# Altium PCB Copy of 智能插座2019_1_7.PcbDoc
Units mil, origin at the board's own origin, x right, y up, seen from the top; angles counter-clockwise.
Board outline 3149.61 x 3089.41 mil, 2 copper layers (Top Layer, Bottom Layer); 88 components, 65 nets, 285 pads, 56 vias.
Unrouted connection lines stored in the file: 45.
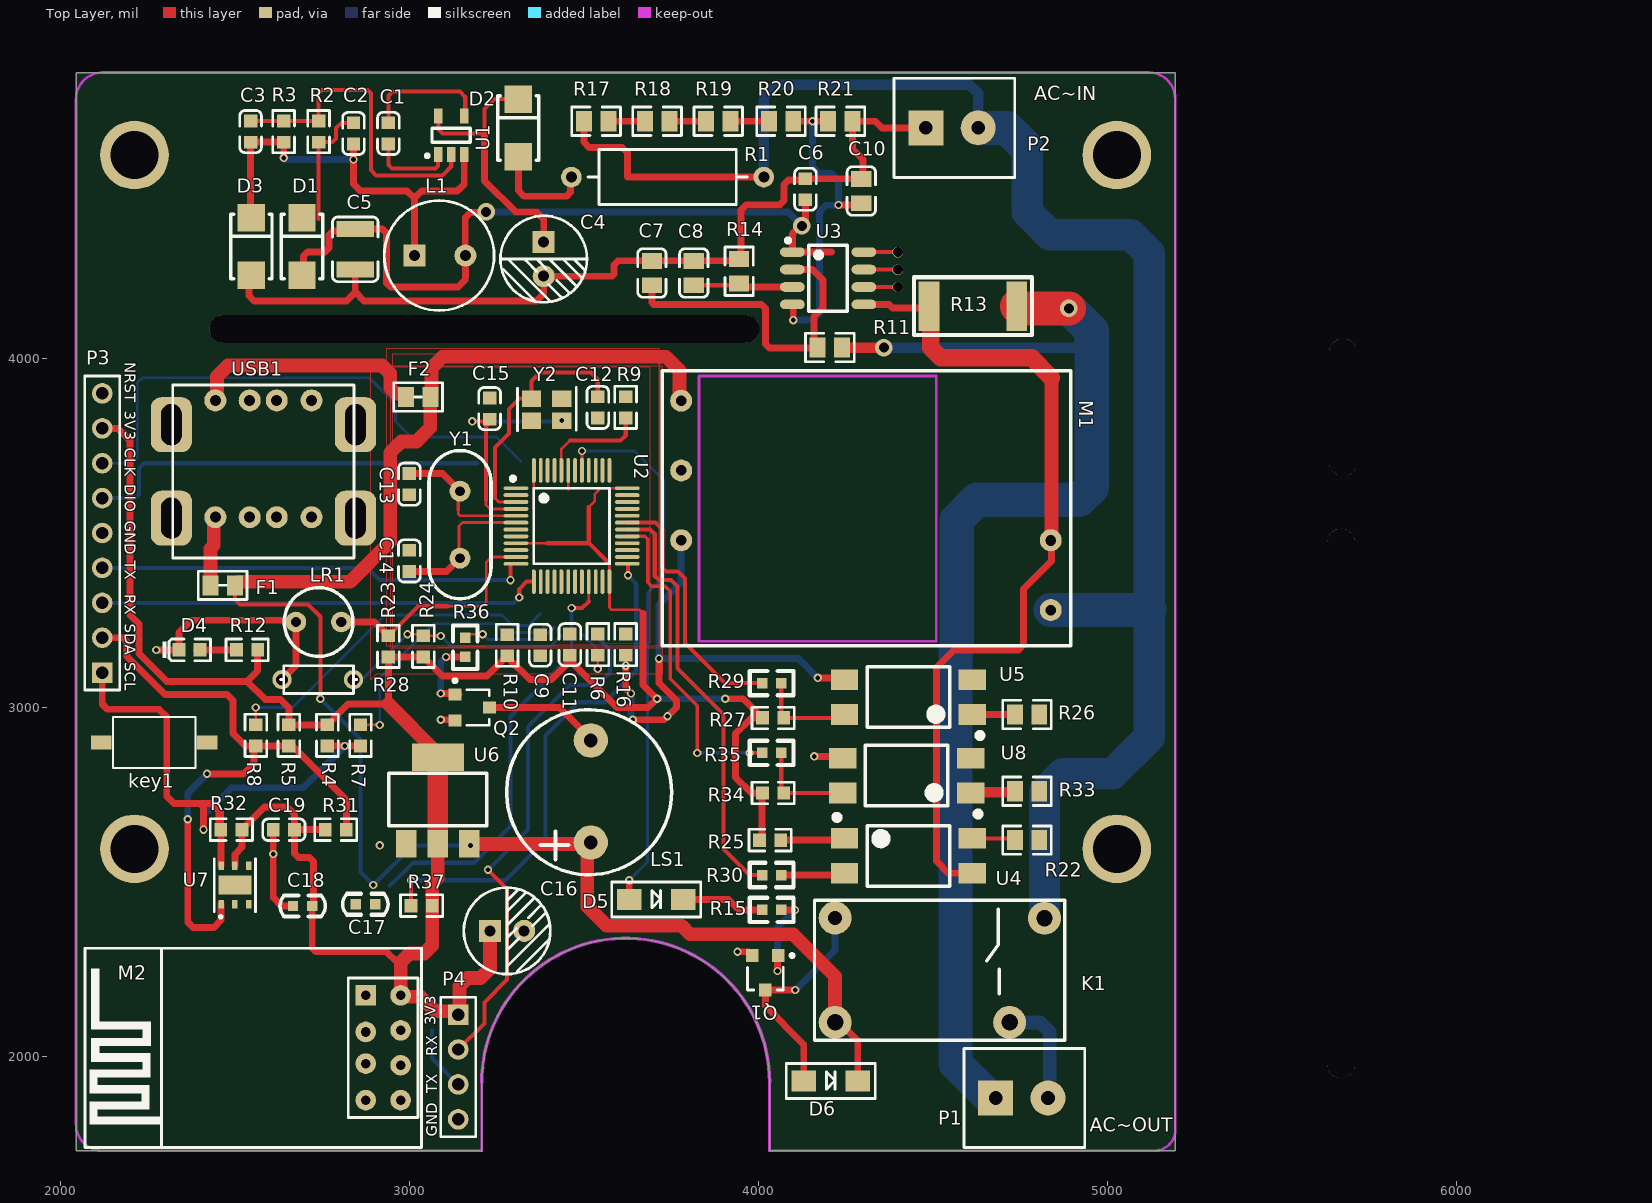
[diagram p0: Top Layer view]
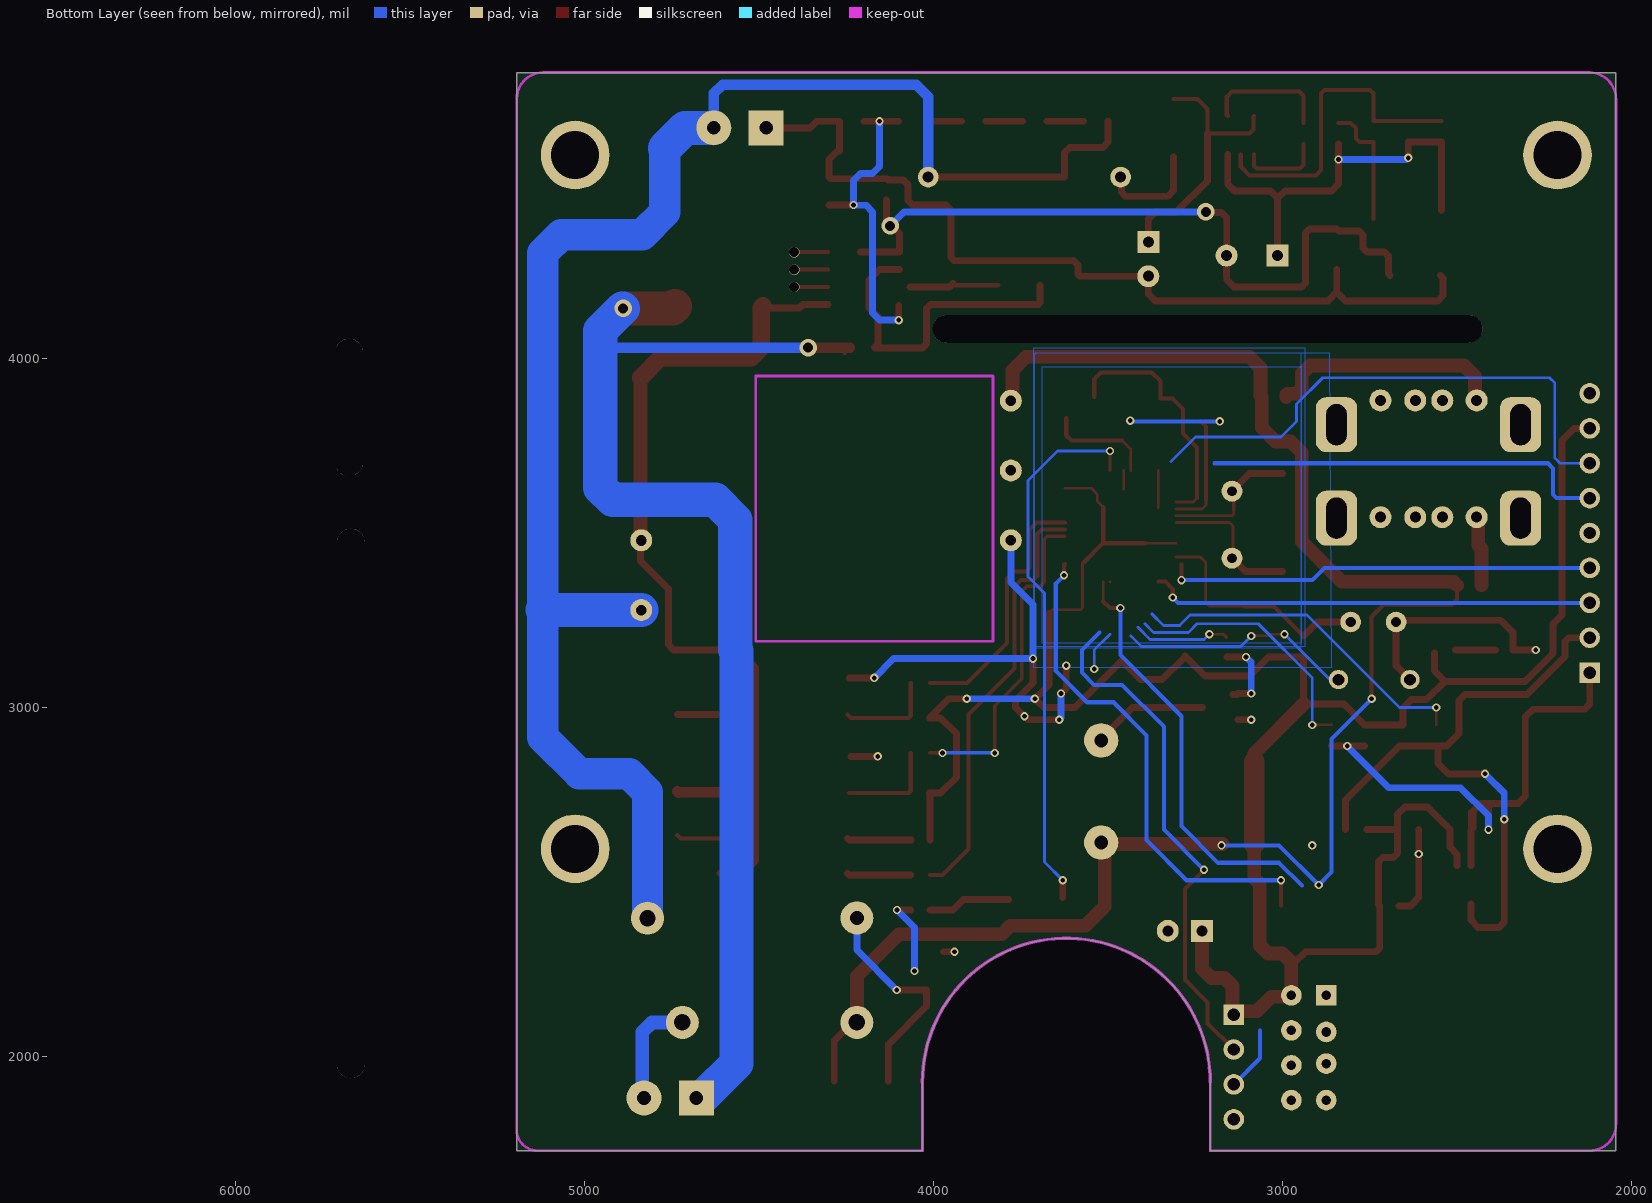
[diagram p1: Bottom Layer view, seen from below]

## Layer stack, top to bottom
Top Solder: solder mask 0.4, Solder Resist, Dk 3.5
Top Layer: signal copper 1.4
Dielectric1: dielectric 12.6, FR-4, Dk 4.8
Bottom Layer: signal copper 1.4
Bottom Solder: solder mask 0.4, Solder Resist, Dk 3.5

## Board outline
2045,1730 2045,4819.41 5194.61,4819.41 5194.61,1730 4032.32,1730 4032.32,1925.71 ccw(c3619.84,1926.42) 3207.36,1925.71 3207.36,1730.04 3207.32,1730

## Design rules (kind name [scope] priority, off if disabled: settings)
Clearance [All] p1: gap=5 ignorepadtopadclearanceinfootprint=FALSE
ComponentClearance [All] p1 off: gap=10 collisioncheckmode=3 verticalgap=10 showdistances=FALSE
FabricationTestPointUsage TestPointUsage [All] p1: valid=0 allowmultiple=FALSE
FabricationTestpoint Testpoint [All] p1: side=3 testpointundercomponent=TRUE minsize=40 maxsize=100 preferedsize=60 minholesize=0 maxholesize=40 preferedholesize=32 testpointgrid=1 allowsidetop=TRUE allowsidebottom=TRUE usegrid=TRUE gridtolerance=0.01
PolygonConnect [All] p1: connectstyle=Relief reliefconductorwidth=10 reliefentries=4 polygonreliefangle="90 Angle" airgapwidth=10
RoutingVias [All] p1 off: holewidth=28 width=50 viastyle="Through Hole" minholewidth=28 minwidth=50 maxholewidth=28 maxwidth=50
SolderMaskExpansion [All] p1: expansion=4
Width [All] p1: maxlimit=308.11 minlimit=7.87 preferedwidth=19.68
27 further rules are at their usual default settings.

## Components (designator, comment, footprint, x,y, rotation, side; value= is the part's Value field where it differs from the comment)
C1 "2.2μF/10V" LC-0603_C 2940,4645 r270 top value="100nF (104) ±10% 50V"
C2 "220nF" LC-0603_C 2840,4645 r90 top value="100nF (104) ±10% 50V"
C3 "470pF" LC-0603_C 2545,4650.32 r90 top value="100nF (104) ±10% 50V"
C4 "3.3μF/400V" CAP-ELECT-TH-6.3X7 3385,4285 r270 top value=2.2μF/400V
C5 "100μF" LC-1210_C 2845,4313.07 r90 top value="100nF (104) ±10% 50V"
C6 "0.1μF" LC-0603_C 4135,4485 r90 top value="100nF (104) ±10% 50V"
C7 "33nF" LC-0805_C 3695,4245 r90 top value="100nF (104) ±10% 50V"
C8 "33nF" LC-0805_C 3815,4245 r270 top value="100nF (104) ±10% 50V"
C9 "0.1μF" LC-0603_C 3375,3178.37 r90 top
C10 "33nF" LC-0805_C 4295,4480 r90 top value="100nF (104) ±10% 50V"
C11 "0.1μF" LC-0603_C 3460,3180 r270 top
C12 "6pF" LC-0603_C 3540,3860 r270 top
C13 "20pF" LC-0603_C 3000,3640 r270 top
C14 "20pF" LC-0603_C 3000,3420 r90 top
C15 "6pF" LC-0603_C 3230,3856.61 r90 top
C16 "1000μF/400V" CAP-ELECT-TH-6.3X7 3280,2360 r0 top value=2.2μF/400V
C17 "104" 0603C 2880,2435 r0 top
C18 "104" 0603C 2700,2430 r0 top
C19 "0.1μF" LC-0603_C 2640.43,2649.96 r0 top
D1 "1N4007" LC-SMA(DO-214AC)_S1 2700,4320 r270 top
D2 "1N4007" LC-SMA(DO-214AC)_S1 3320,4660 r270 top
D3 "US1J(600V 1A)" LC-SMA(DO-214AC)_S1 2555,4320 r270 top
D4 "POWER" LC-0603_LED_S1 2370,3165 r0 top value=红?
D5 "IN4148" 1206D 3580,2420 r90 top
D6 "" 1206D 4080,1900 r90 top
F1 "1.1A  自恢复保险丝" AFUSE 2460,3360 r180 top
F2 "1.1A  自恢复保险丝" AFUSE 3020,3900 r180 top
K1 "Relay-5V" SJ-S-105LMH 4220,2200 r0 top
key1 "SW" KEY-2 2420,2900 r180 top
L1 "1mH" L-10X14 3085.32,4295 r0 top
LR1 "光敏电阻" GUANGMIN 2740,3245 r180 top
LS1 "BUZZER 5V" BUZZER 3520,2760 r270 top
M1 "ACDC_THX208based" ACDC_THX208 4895,3180 r180 top
M2 "ESP-01&01S Module" "ESP-01&01S Module" 2925,2025 r90 top
P1 "Header" 3.81-2P 4680,1880 r0 top
P2 "Header" 3.81-2P 4480,4660 r0 top
P3 "Header 9" HDR1X9 2120,3100 r90 top
P4 "Header 4" HDR1X4 3140,2120 r270 top
Q1 "S8050" SOT-23 4020,2240 r180 top
Q2 "S8050" SOT-23 3180,3000 r270 top
R1 "39Ω/1W" R-1W-THT 3740,4520 r180 top
R2 "5.49KΩ" LC-0603_R 2740,4650.32 r270 top
R3 "4.99KΩ" LC-0603_R 2640,4650.31 r90 top
R4 "4.7KΩ" LC-0603_R 2765,2920 r270 top
R5 "4.7KΩ" LC-0603_R 2655,2920 r270 top
R6 "10KΩ" LC-0603_R 3540,3180 r270 top
R7 "100" LC-0603_R 2860,2920 r90 top
R8 "100" LC-0603_R 2560,2920 r90 top
R9 "10KΩ" LC-0603_R 3620,3860 r90 top
R10 "10KΩ" LC-0603_R 3280,3178.37 r270 top
R11 "1KΩ,1%" LC-0805_R 4205,4031.46 r0 top
R12 "1.5KΩ" LC-0603_R 2535,3165 r0 top
R13 "2mΩ/25A" R2512 4615,4150 r180 top
R14 "1KΩ,1%" LC-0805_R 3945,4250 r90 top
R15 "Res2" 0603 4065.61,2420 r180 top value=4.7K
R16 "0Ω" LC-0603_R 3620,3180 r90 top
R17 "470KΩ,1%" LC-0805_R 3535,4680 r180 top
R18 "470KΩ,1%" LC-0805_R 3710,4680 r180 top
R19 "470KΩ,1%" LC-0805_R 3885,4680 r180 top
R20 "470KΩ,1%" LC-0805_R 4065,4680 r180 top
R21 "1KΩ,1%" LC-0805_R 4235,4680 r0 top
R22 "1KΩ,1%" LC-0805_R 4770,2620 r0 top
R23 "10KΩ 1%" LC-0603_R 2940,3175 r270 top
R24 "10KΩ 1%" LC-0603_R 3040,3175 r270 top
R25 "2.2KΩ" LC-0603_R 4033.99,2620 r180 top
R26 "1KΩ,1%" LC-0805_R 4769.96,2980 r0 top
R27 "2.2KΩ" LC-0603_R 4042.25,2970 r180 top
R28 "MF52-10K   3950 1％" AXIAL-0.3 2740,3080 r180 top value=MF52-10K
R29 "0Ω/1W" 0603 4065.61,3070 r180 top
R30 "0Ω/1W" 0603 4010.61,2520 r0 top
R31 "10KΩ" LC-0603_R 2789.17,2649.96 r0 top
R32 "10KΩ" LC-0603_R 2490,2650 r180 top
R33 "1KΩ,1%" LC-0805_R 4769.96,2760 r0 top
R34 "2.2KΩ" LC-0603_R 4042.25,2755 r180 top
R35 "0Ω/1W" 0603 4065.61,2870 r180 top
R36 "4.7K" 0603 3160,3200 r270 top
R37 "4.7KΩ" LC-0603_R 3035,2432.22 r0 top
U1 "MP150" LC-SOT-23-5 3120,4640 r270 top
U2 "STM32F103C8T6" LC-LQFP-48_7x7x05P 3465,3520 r270 top
U3 "HLW8032" LC-SOP-8_150mil 4200,4230 r270 top
U4 "PC817" LC-SMD-4 4430,2575 r0 top
U5 "PC817" LC-SMD-4 4430,3030 r180 top
U6 "LM1117-3.3V" SOT-223/P2.3 3080,2720 r90 top
U7 "SHT1" SHT2X 2500.04,2436.5 r0 top
U8 "PC817" LC-SMD-4 4425,2805 r180 top
USB1 "2_USB" 2_USB 2600,3880 r180 top
Y1 "8M" 49/U_N 3145,3620 r270 top value="25MHz ±20ppm 20pF"
Y2 "32.768K" 0SC_3225 3390,3860 r180 top

## Footprints (in the part's own frame and the unit in brackets; to place one, negate y for a bottom-side part, rotate by r counter-clockwise, add the part's x,y. Pads: shape width x height; smd on the part's side, far side on the other; paste and mask are expansions set on the pad)
0SC_3225 [mm]
  rect 1.4x1.2 smd: 1(-1.184,0.965) 2(1.016,-0.635) GND(-1.184,-0.635) GND(1.016,0.965)
  silkscreen extent -2.24,-1.45 2.03,1.7
2_USB [mm]
  rrect50% 3x4 hole 1.5 slot 3 at 90 deg: 0(-6.24,8.57) 0(-6.24,1.77) 0(7.16,8.57) 0(7.16,1.77)
  round 1.6 hole 0.8: 1(3.96,8.5) 2(-0.508,8.5) 3(1.46,8.5) 4(-3.04,8.5) 5(3.96,0) 6(-0.508,0) 7(1.46,0) 8(-3.04,0)
  silkscreen extent -6.14,-1.13 7.06,11.47
3.81-2P [mil]
  rect 100x100 hole 39.37: 1(0,0.99)
  round 100 hole 39.37: 2(150,1)
  silkscreen extent -91,-141 255,143
49/U_N [mil]
  round 60 hole 28: 1(0,0) 2(192,0)
  silkscreen extent -116,-88 308,89, body extent -117,-88 309,89, height 512
0603 [mil]
  rect 30x30 smd: 1(0,0) 2(55,0)
  silkscreen extent -35,-35 90,35
0603C [mil]
  rect 30x30 smd: 1(21.61,1.26) 2(-33.39,1.26)
  silkscreen extent -71,-29 59,31
1206D [mil]
  rect 60x70 smd: 1(30,-50) 2(30,-205)
  silkscreen extent -20,-255 80,0
ACDC_THX208 [mm]
  round 1.6 hole 0.762: 1(1.45,-2.52) 3(28.35,-7.6) 4(28.35,-12.68) 5(28.35,-17.76)
  round 1.6 hole 0.8: 2(1.45,-7.6)
  silkscreen extent 0,-19.94 29.72,0.06
AFUSE [mm]
  rect 1.16x1.47 smd: 1(-1.017,0.254) 2(0.763,0.254)
  silkscreen extent -1.9,-0.78 1.64,1.29, body extent -1.12,-0.37 0.88,0.88, height 0.49
AXIAL-0.3 [mm] "Resistor; 2 Leads"
  round 1.4 hole 0.85: 1(-2.54,0) 2(2.667,0)
  silkscreen extent -2.77,-1.02 2.77,1.02
BUZZER [mm]
  round 2.5 hole 1: 1(3.728,0) 2(-3.703,0)
  silkscreen extent -5.93,-6.12 6.07,5.87
CAP-ELECT-TH-6.3X7 [mm]
  rect 1.6x1.6 hole 0.8: 1(-1.25,0)
  round 1.6 hole 0.8: 2(1.25,0)
  silkscreen extent -3.15,-3.15 3.15,3.15
"ESP-01&01S Module" [mm]
  rect 1.5x1.5 hole 0.7: 1(3.81,1.27)
  round 1.5 hole 0.7: 2(1.15,1.27) 3(-1.15,1.27) 4(-3.81,1.27) 5(3.81,-1.27) 6(1.27,-1.27) 7(-1.27,-1.27) 8(-3.81,-1.27)
  silkscreen extent -7.25,-2.79 7.25,21.71
GUANGMIN [mm]
  round 1.5 hole 0.75: 1(-1.651,0) 2(1.651,0)
  silkscreen extent -2.5,-2.5 2.5,2.5
HDR1X4 [mm] "Connector; Header; 4 Position"
  rect 1.5x1.5 hole 0.9: 1(0,0)
  round 1.5 hole 0.9: 2(2.54,0) 3(5.08,0) 4(7.62,0)
  silkscreen extent -1.27,-1.27 8.89,1.27
HDR1X9 [mm] "Connector; Header; 9 Position"
  rect 1.5x1.5 hole 0.9: 1(0,0)
  round 1.5 hole 0.9: 2(2.54,0) 3(5.08,0) 4(7.62,0) 5(10.16,0) 6(12.7,0) 7(15.24,0) 8(17.78,0) 9(20.32,0)
  silkscreen extent -1.27,-1.27 21.59,1.27
KEY-2 [mm]
  rect 1.5x1 smd: 1(-0.005,-0.001) 2(7.685,-0.001)
  silkscreen extent 0.85,-1.85 6.85,1.86
L-10X14 [mm]
  rect 1.6x1.6 hole 0.8: 1(-1.786,0)
  round 1.6 hole 0.8: 2(1.913,0)
  silkscreen extent -4,-4 4,4
LC-0603_C [mm]
  rect 0.93x0.98 smd: 1(-0.77,0) 2(0.77,0)
  silkscreen extent -1.54,-0.79 1.54,0.79, body extent -0.8,-0.4 0.8,0.4, height 0.3
LC-0603_LED_S1 [mm]
  rect 0.93x0.98 smd: A(0.77,0) K(-0.77,0)
  silkscreen extent -1.97,-0.79 1.53,0.79, body extent -0.8,-0.4 0.8,0.4, height 0.6
LC-0603_R [mm]
  rect 0.93x0.98 smd: 1(-0.77,0) 2(0.77,0)
  silkscreen extent -1.53,-0.79 1.54,0.79, body extent -0.85,-0.4 0.85,0.4, height 0.56
LC-0805_C [mm]
  rect 1.16x1.47 smd: 1(-0.89,0) 2(0.89,0)
  silkscreen extent -1.77,-1.04 1.77,1.04, body extent -1,-0.62 1,0.63, height 0.77
LC-0805_R [mm]
  rect 1.16x1.47 smd: 1(-0.89,0) 2(0.89,0)
  silkscreen extent -1.77,-1.03 1.77,1.04, body extent -1,-0.62 1,0.63, height 0.49
LC-1210_C [mm]
  rect 1.16x2.72 smd: 1(-1.475,0) 2(1.475,0)
  silkscreen extent -2.36,-1.66 2.35,1.66, body extent -1.6,-1.25 1.6,1.25, height 1.3
LC-LQFP-48_7x7x05P [mm]
  oval 0.28x1.8 smd: 1(-2.75,-4.05) 2(-2.25,-4.05) 3(-1.75,-4.05) 4(-1.25,-4.05) 5(-0.75,-4.05) 6(-0.25,-4.05) 7(0.25,-4.05) 8(0.75,-4.05) 9(1.25,-4.05) 10(1.75,-4.05) 11(2.25,-4.05) 12(2.75,-4.05) 25(2.75,4.05) 26(2.25,4.05) 27(1.75,4.05) 28(1.25,4.05) 29(0.75,4.05) 30(0.25,4.05) 31(-0.25,4.05) 32(-0.75,4.05) 33(-1.25,4.05) 34(-1.75,4.05) 35(-2.25,4.05) 36(-2.75,4.05)
  oval 1.8x0.28 smd: 13(4.05,-2.75) 14(4.05,-2.25) 15(4.05,-1.75) 16(4.05,-1.25) 17(4.05,-0.75) 18(4.05,-0.25) 19(4.05,0.25) 20(4.05,0.75) 21(4.05,1.25) 22(4.05,1.75) 23(4.05,2.25) 24(4.05,2.75) 37(-4.05,2.75) 38(-4.05,2.25) 39(-4.05,1.75) 40(-4.05,1.25) 41(-4.05,0.75) 42(-4.05,0.25) 43(-4.05,-0.25) 44(-4.05,-0.75) 45(-4.05,-1.25) 46(-4.05,-1.75) 47(-4.05,-2.25) 48(-4.05,-2.75)
  silkscreen extent -3.6,-4.42 2.75,2.75
LC-SMA(DO-214AC)_S1 [mm]
  rect 2x2 smd: 1(2.076,-0.194) 2(-2.124,-0.194)
  silkscreen extent -2.37,-1.69 2.33,1.31
LC-SMD-4 [mm]
  rect 2x1.5 smd: 1(-4.65,1.27) 2(-4.65,-1.27) 3(4.65,-1.27) 4(4.65,1.27)
  silkscreen extent -5.4,-2.2 3,3, body extent -5.02,-2.42 5.01,2.42, height 3.9
LC-SOP-8_150mil [mm]
  oval 0.7x1.8 smd: 1(-1.905,-2.6) 2(-0.635,-2.6) 3(0.635,-2.6) 4(1.905,-2.6) 5(1.905,2.6) 6(0.635,2.6) 7(-0.635,2.6) 8(-1.905,2.6)
  silkscreen extent -2.9,-3.07 2.4,1.4, body extent -2.5,-3.1 2.5,3.1, height 1.75
LC-SOT-23-5 [mm]
  rect 1.1x0.6 smd: 1(1.4,-0.95) 2(1.4,0) 3(1.4,0.95) 4(-1.4,0.95) 5(-1.4,-0.95)
  silkscreen extent -0.5,-1.87 1.62,1.4
R2512 [mm]
  rect 1.5x3.6 smd: 1(-3.2,0) 2(3.2,0)
  silkscreen extent -4.3,-2.1 4.3,2.1
R-1W-THT [mm]
  round 1.5 / inner oval 1.5x2 / far side round 1.5 hole 0.8: 1(-7,0)
  round 1.5 hole 0.8: 2(7,0)
  silkscreen extent -5.8,-2 5.8,2
SHT2X [mm]
  rect 2.4x1.4 smd: 0(0,1.4)
  rect 0.4x0.6 smd: 1(-1,0) 2(0,0) 3(1,0) 4(1,2.8) 5(0,2.8) 6(-1,2.8)
  silkscreen extent -1.5,-0.95 1.5,3.3
SJ-S-105LMH [mm]
  round 2.4 hole 1: 1(0,5)
  round 2.4 hole 1.2: 2(0,-2.6) 3(15.24,4.984) 4(12.7,-2.6)
  silkscreen extent -1.5,-3.9 16.7,6.3
SOT-23 [mm] "SOT-23; 3 Leads; Body 3.0 x 2.6 mm, inc. leads (LxW max)"
  rect 0.9x0.95 smd: 1(-0.95,-1.25) 2(0.95,-1.25) 3(0,1.25)
  silkscreen extent -2.08,-1.37 1.3,1.25
SOT-223/P2.3 [mil]
  rect 79x59 smd: 1(-111,89.1) 2(-111,-1.45) 3(-111,-92)
  rect 79x150 smd: 2(137,-1.9)
  silkscreen extent -59,-141 91,139

## Part data
C1 C2 C3 C5 C6 C7 C8 C10: library part CAP, "贴片电容"
C4 C16: library part "Cap Pol1", "直插电解电容", LatestRevisionDate=17-Jul-2002, LatestRevisionNote="Re-released for DXP Platform.", PackageReference=RB7.6-15, Published=8-Jun-2000, Publisher="Altium Limited"
C9 C11 C12 C13 C14 C15 C19: library part Cap, "贴片电容", 封装=0
C17 C18: library part CAP, "Capacitor"
D1 D2 D3: library part "Diode 1N5408", "贴片二极管", ComponentLink1Description="Manufacturer Link", ComponentLink1URL=http://www.irf.com/, DatasheetDocument=Aug-1984, LatestRevisionDate=17-Jul-2002, LatestRevisionNote="Re-released for DXP Platform.", PackageReference=DO-201AD, Published=8-Jun-2000, Publisher="Altium Limited"
D4: library part LED1, "发光二极管"
D5 D6: library part Diode, "Default Diode", PackageDocument=Sep-1996, Code_JEDEC=DO-214-AB, LatestRevisionDate=17-Jul-2002, LatestRevisionNote="Re-released for DXP Platform.", PackageReference=SMC, Published=8-Jun-2000, Publisher="Altium Limited"
F1 F2: library part "Fuse 2", "Fuse", LatestRevisionDate=17-Jul-2002, LatestRevisionNote="Re-released for DXP Platform.", PackageReference=PIN-W2/E2.8, Published=8-Jun-2000, Publisher="Altium Limited"
K1: library part SJ-S-105LMH, "Single-Pole Dual-Throw Relay", LatestRevisionDate=17-Jul-2002, LatestRevisionNote="Re-released for DXP Platform.", PackageReference=MODULE5B, Published=24-Mar-1999, Publisher="Altium Limited"
key1: "Switch", LatestRevisionDate=17-Jul-2002, LatestRevisionNote="Re-released for DXP Platform.", PackageReference=SPST-2, Published=24-Mar-1999, Publisher="Altium Limited"
L1: library part IND_8, "直插绕线电感", AtherosDescription="IND,SMT,SHIELDING CHOKE,10uH,7.3x7.3", ATHEROS KEY=078-100LM-000, CISPartType=Inductor\Ferrite, OriginalSymbolOrigin=(0,0)
LS1: library part Bell, "Electrical Bell", LatestRevisionDate=17-Jul-2002, LatestRevisionNote="Re-released for DXP Platform.", PackageReference=PIN2, Published=24-Mar-1999, Publisher="Altium Limited"
M1: library part ACDC, "THX208Based"
P1 P2: library part "Header 2", "Header, 2-Pin", LatestRevisionDate=17-Jul-2002, LatestRevisionNote="Re-released for DXP Platform.", Publisher="Altium Limited"
P3: "Header, 9-Pin", LatestRevisionDate=17-Jul-2002, LatestRevisionNote="Re-released for DXP Platform.", Publisher="Altium Limited"
P4: "Header, 4-Pin", LatestRevisionDate=17-Jul-2002, LatestRevisionNote="Re-released for DXP Platform.", Publisher="Altium Limited"
Q1 Q2: library part NPN, "NPN Bipolar Transistor", Code_JEDEC=TO-226-AA, LatestRevisionDate=17-Jul-2002, LatestRevisionNote="Re-released for DXP Platform.", PackageReference=TO-226, Published=8-Jun-2000, Publisher="Altium Limited"
R1 R2 R3 R4 R5 R6 R7 R8 R9 R10 R11 R12 R13 R14 R16 R17 R18 R19 R20 R21 R22 R23 R24 R25 R26 R27 R29 R30 R31 R32 R33 R34 R35: library part 电阻, "贴片电阻"
R15: "Resistor", LatestRevisionDate=17-Jul-2002, LatestRevisionNote="Re-released for DXP Platform.", PackageReference=AXIAL-0.4, Published=8-Jun-2000, Publisher="Altium Limited"
R28: library part "Res Adj2", "Variable Resistor", LatestRevisionDate=17-Jul-2002, LatestRevisionNote="Re-released for DXP Platform.", PackageReference=AXIAL-0.6, Published=8-Jun-2000, Publisher="Altium Limited", Set Position=0.5
R36: library part Res2, "Resistor", LatestRevisionDate=17-Jul-2002, LatestRevisionNote="Re-released for DXP Platform.", PackageReference=0805, Published=8-Jun-2000, Publisher="Altium Limited"
R37: library part "0805 62KΩ (6202) 1%", "贴片电阻", Package=0402, SuppliersPartNumber=C17783, ComponentLink1Description=¹©Ó, ComponentLink1URL=http://www.szlcsc.com/product/details_18471.html, Supplier=LC
U1 U3: "IC"
U2: library part STM32F103CBT6, "IC", ComponentLink1Description="Manufacturer Link", ComponentLink1URL=www.st.com/stm32, ComponentLink2Description=Datasheet, ComponentLink2URL=http://www.st.com/stonline/products/literature/ds/13587.pdf, DatasheetVersion="rev6, Mar-2008", PackageDescription="48-Pin Low-Profile Quad Flat Pack, 7 x 7 mm Body, 0.5 mm Pitch (LQFP48)", PackageReference=LQFP48, PackageVersion=Mar-2008, Published=30-May-2008, Publisher="Altium Limited", 型号=STM32F103C, 封装=LQF
U4 U5 U8: library part PS2501L-1-F3-A, "IC"
U6: library part 1117
U7: library part SHT21
Y1: library part XTAL_1, "晶振（直插）", LatestRevisionDate=17-Jul-2002, LatestRevisionNote="Re-released for DXP Platform.", PackageReference=R38, Published=8-Jun-2000, Publisher="Altium Limited"
Y2: library part XTAL, "Crystal Oscillator", LatestRevisionDate=17-Jul-2002, LatestRevisionNote="Re-released for DXP Platform.", PackageReference=R38, Published=8-Jun-2000, Publisher="Altium Limited"

## Free pads (board coordinates)
  round 196.85 hole 137.8: 0(2212.32,2595) 0(2212.32,4583.19) 0(5027.28,2595) 0(5027.28,4583.19)
  oval 1574.8x78.74 hole 78.74 slot 1574.8 at 0 deg unplated paste+0: 0(3215,4085)
  oval 78.74x1574.8 hole 78.74 slot 1574.8 at 90 deg unplated paste+0: 0(5670,2725)
  oval 78.74x393.7 hole 78.74 slot 393.7 at 90 deg unplated paste+0: 0(5675,3860)

## Via types
v1: diameter 23.62, hole 13.78, Top Layer to Bottom Layer, 49 vias
v2: diameter 50, hole 28, Top Layer to Bottom Layer, 4 vias
v3: diameter 30, hole 28, Top Layer to Bottom Layer, 3 vias

## Nets (pads, with @x,y where several pads share a name; then routed paths per layer and width w, separated by ;. In a path a pad name is that pad's centre, name@x,y a point inside that pad or via, vN(x,y) a via of type N, cw(c..) or ccw(c..) an arc to the next point about the centre after c; other vN are vias at no path point)
+3.3V: C11.2 C16.1 C18.1 C19.2 M2.5 P3.8 P4.1 R4.1 R5.1 R10.2 R12.2 R23.2 R24.2 R25.2 R27.2 R31.1 R32.1 R34.2 R37.2 U2.9 U2.24 U2.36 U2.48 U6.2 U7.5 | length 7173.5
  Top Layer w7.87: U2.9 3395,3470.79 ; 3356.73,3573.27 U2.48 ; 3514.21,3574.21 3530.89,3590.89 3530.89,3610.89 3548.27,3628.27 U2.36 ; 3570,3415 3573.27,3411.73 U2.24 3573.27,3286.73 3580,3280 3660,3280 3670,3270
  Top Layer w11.81: 3395,3470.79 3514.21,3470.79 ; 3514.21,3574.21 3514.21,3470.79 ; 3570,3415 3514.21,3470.79
  Top Layer w19.68: P3.8 2165,3800 2200,3765 2200,3265 2225,3240 2225,3155 2305,3075 2535,3075 ; U7.5 2500,2546.77 2500,2579.41 2520.31,2599.72 R32.1 2585.31,2715 2650,2715 2670.75,2694.25 C19.2 ; R12.2@2565.32,3156.18 2565.32,3105.32 2535,3075 ; R5.1 R5.1@2655,2955 ; R31.1 C19.2 ; R23.2 R24.2 3094.68,3090 3221.94,3090 R10.2 ; R23.2@2940,3145 2940,3010 2824.68,3010 R4.1 2659.68,2950.32 R5.1@2655,2955 ; 2975,2269.1 2965.9,2269.1 2935,2300 2733.15,2300 2721.61,2311.53 C18.1 2725,2434.65 2725,2558.47 2713.47,2570 2682.28,2570 2670.75,2581.53 C19.2 ; U6.2@3081.45,2845 3081.45,2856.55 U6.2@3081.45,2868.55 ; R10.2@3280,3145 3345,3080 3406.94,3080 C11.2@3460,3133.06 ; C11.2@3460,3135 3595,3000 3683.99,3000 v1@3708.99,3025 ; 3670,3270 3670,3065 v1(3710,3025) ; v1(3905,3025) 3956.93,3025 R27.2 3980,2970 3935,2925 3935,2800 3980,2755 R34.2 4010,2753.07 R25.2@4010,2620 ; 2535,3075 2587.5,3022.5 2630.65,3022.5 2655,2998.15 R5.1@2655,2955
  Top Layer w39.37: 2940,3010 U6.2@3081.45,2868.55 ; U6.2@3081.45,2609 3081.45,2510.45 3065.32,2494.31 R37.2 3065.32,2318.06 3042.25,2295 3000.9,2295 2975,2269.1 M2.5 2978.77,2171.23 3031.94,2171.23 3073.33,2129.84 3130.16,2129.84 P4.1 3143.58,2123.58 3143.58,2201.94 3166.65,2225 3204.21,2225 3230.79,2251.58 C16.1 ; U6.2@3081.45,2856.55 U6.2@3081.9,2857
  Top Layer w59.06: U6.2@3081.45,2609 U6.2@3081.45,2845
  Bottom Layer w19.68: v1(3710,3025) v1(3905,3025)
+5V: C17.1 D6.2 F1.1 F2.1 K1.2 LS1.1 M1.5 U6.3 | length 5023.2
  Top Layer w11.81: F1.1 2500.04,3310 2515.04,3295 2710,3295 2745,3260 v1(2745,3025) ; v1(2896.61,2491.61) v1@2900,2495
  Top Layer w19.68: K1.2 4232.36,2097.64 4285,2045 D6.2
  Top Layer w39.37: F1.1 2510.04,3360 2830,3360 2945,3475 2945,3730 2977.5,3762.5 3020.53,3762.5 3060.04,3802.01 F2.1 3063.19,3893.15 3063.19,3973.19 3095,4005 3735,4005 3774.34,3965.66 3774.34,3883.73 M1.5 ; U6.3 LS1.1@3515.78,2609 ; LS1.1 3510,2603.22 3510,2430 3565,2375 3780,2375 3805,2350 4100,2350 4220,2230 K1.2
  Bottom Layer w11.81: v1(2745,3025) 2860,2910 2860,2528.23 v1(2896.61,2491.61) 3010,2605 v1(3175,2605)
A+5V: C5.2 C6.1 D1.1 L1.2 R22.2 R26.2 R33.2 U3.1 | length 2151.4
  Top Layer w19.68: D1.1 2697.2,4243.11 2697.2,4293.47 2708.73,4305 2758.47,4305 2770,4316.53 2770,4353.47 2781.53,4365 2838.86,4365 C5.2 2923.47,4371.14 2935,4359.61 2935,4216.53 2946.53,4205 3140,4205 3160,4225 3160,4233.35 3160.63,4233.98 L1.2 ; L1.2@3160,4305 3160,4403 3175.55,4418.55 3218.55,4418.55 v2(3220,4420) ; v2@4122.5,4382.5 4097.64,4357.64 U3.1 4210,4305 ; v2@4135,4395 C6.1
  Bottom Layer w19.68: v2(3220,4420) 4085,4420 v2(4125,4380)
AC220V-L: K1.3 M1.1 P2.2 R1.1 R17.2 | length 4768.5
  Top Layer w19.68: R17.2 3499.96,4620.04 3515,4605 3610,4605 3625,4590 3625,4520 R1.1
  Bottom Layer w30: R1.1 4015.59,4750.59 4050,4785 4605,4785 4630,4760 P2.2
  Bottom Layer w90: 4770,4603.04 4770,4420 4835,4355 5067.28,4355 5120,4302.28 5120,3280 5120,2915 5015,2810 4872.72,2810 4820,2757.28 K1.3
  Bottom Layer w98.43: P2.2 4630.3,4660.7 4712.34,4660.7 4770,4603.04 ; M1.1 5119.21,3279.21 5120,3280
AC220V-N: C4.2 C5.1 C6.2 C7.2 C8.1 C10.2 D3.1 M1.2 P2.1 R13.2 R14.2 R21.2 U3.5 U4.3 | length 5050.9
  Top Layer w19.68: D3.1 2540,4230.91 2540,4180 2555,4165 2820,4165 2845,4190 ; C5.1 2845,4190 ; R21.2 4270,4595 4275,4595 4300,4570 4300,4520.04 C10.2 4294.73,4515.31 C6.2 4130.87,4511.18 4086.18,4511.18 4073.78,4498.78 4073.78,4453.46 4060.32,4440 3965,4440 3950,4425 3950,4290.04 3940,4280.04 C8.1 C7.2 3598.01,4280.04 3586.48,4268.51 3586.48,4241.48 3580.78,4235.78 C4.2 3385,4185 3365,4165 2870,4165 2845,4190 ; R21.2 4335,4680 4354.01,4660.99 P2.1 ; U3.5 4375,4155 4385,4145 4484.02,4145 R13.2 R13.2@4490,4150.98 ; U4.3 4545,2525 4510,2560 4510,3115 4560,3165 4745,3165 4760,3180 4760,3340 4840,3420 4840,3477.13 M1.2
  Top Layer w39.37: M1.2@4840,3480 4840,3945
  Top Layer w50: R13.2 4493.54,4145.47 4493.54,4031.46 4522.83,4002.17 4782.83,4002.17 4840,3945 ; R13.2@4489.02,4151.97 R13.2@4490,4150.98
ADC_IN1: LR1.1 R23.1 U2.11 | length 678.3
  Top Layer w7.87: 3110,3290 3210,3290 3220,3300 3220,3415.23 3236.18,3431.42 U2.11
  Top Layer w11.81: R23.1@2940.16,3205.16 3025,3290 3110,3290
  Top Layer w19.68: LR1.1 2900.31,3245 R23.1@2940.16,3205.16
ADC_IN8: R24.1 R28.1 U2.18 | length 675.3
  Top Layer w7.87: v1(2995,3210) 3035.31,3210 R24.1 v1@3089.69,3205.31
  Bottom Layer w7.87: R28.1 2865,3080 v1(2995,3210) ; v1(3090,3205) 3120,3175 3405,3175 3435,3205
BOOT0: R9.1 U2.44 | length 311.6
  Top Layer w7.87: U2.44 3435.47,3740.47 3460,3765
  Top Layer w11.81: 3460,3765 3605,3765 3620,3780 R9.1
CTL_PIN: D5.1 U2.41 | length 1561.7
  Top Layer w7.87: U2.41 v1@3494.53,3734.53
  Top Layer w19.68: D5.1@3630,2455 v1(3630,2505)
  Bottom Layer w7.87: v1(3495,3735) 3645,3735 3730,3650 3730,3375 3682.5,3327.5 3682.5,2557.5 v1(3630,2505)
DGND: C16.2 C17.2 C18.2 C19.1 D4.K LR1.2 M1.3 M2.4 P3.5 P4.4 Q1.2 Q2.2 R16.1 R28.2 U5.3 U6.1 U7.2 U8.3 USB1.4 USB1.8 | length 2411.2
  Top Layer w19.68: v1(2275,3165) D4.K 2339.68,3214.68 2375,3250 LR1.2@2670,3250 ; C19.1 2610.12,2454.88 2633.74,2431.26 C18.2 ; R28.2 2675,3120 LR1.2 ; v1@3100,2965 Q2.2@3128.39,2965 ; v1(3620,3120) 3620,3055 v1(3635,3040) ; v1(3640,2965) 3730,2965 3765,3000 3765,3020 3715,3070 v1(3715,3140) ; v1(3940,2300) Q1.2@3971.81,2300 ; v1(4160,2860) U8.3@4236.93,2860 ; v1(4170,3085) U5.3@4241.93,3085
  Bottom Layer w19.68: v1@3635,2970 v1(3635,3040) ; M1.3 3778.86,3358.86 3715,3295 v1(3715,3140) 4115,3140 v1(4170,3085)
  other v1: 2610.12,2580 2915,2605 3090,2965 3740,2975
I2C1_SCL: P3.1 R4.2 R7.1 R32.2 U7.6 | length 1603.4
  Top Layer w19.68: P3.1 2120,3010 2135,2995 2283.15,2995 2305,2973.15 2305,2745 2325,2725 2400,2725 ; v1(2410,2650) 2410,2715 2400,2725 ; U7.6 2460.18,2547.23 2460.18,2649.51 2455,2654.68 2455,2703.5 ; R32.2@2460.63,2649.05 R32.2 2459.68,2698.82 2455,2703.5 ; R4.2 R7.1 ; 2400,2725 2433.5,2725 2455,2703.5
  Bottom Layer w19.68: v1(2410,2650) 2410,2690 2490,2770 2695.31,2770 v1(2815,2889.69)
I2C1_SDA: P3.2 R5.2 R8.1 R31.2 U7.1 | length 1858.7
  Top Layer w19.68: P3.2 2179.06,3200 2190.59,3188.47 2190.59,3146.74 2299.92,3037.4 2477.6,3037.4 2495,3020 2495,2925 2530.31,2889.69 2665.31,2889.69 2819.49,2735.51 R31.2 ; v1(2365,2680) 2365,2385 2380,2370 2440,2370 2460.67,2390.67 U7.1 ; v1(2420,2810) 2525,2810 2555,2840 R8.1@2555,2889.69
  Bottom Layer w19.68: v1(2365,2680) 2365,2755 v1(2420,2810)
L_OUT: K1.4 P1.2 | length 332.4
  Bottom Layer w39.37: K1.4@4730.55,2087.09 K1.4 4807.36,2097.64 4835,2070 4835,1886 P1.2
MCUGND: C9.1 C11.1 C12.2 C13.2 C14.2 C15.2 key1.1 R6.1 R9.2 R16.2 U2.8 U2.23 U2.35 U2.47
NetC1_1: C1.1 U1.4 | length 364.9
  Top Layer w11.81: C1.1 2940,4753.06 2951.94,4765 3145,4765 3160,4750 3160,4697.72 U1.4
NetC1_2: C1.2 U1.1 | length 241.9
  Top Layer w11.81: C1.2 2940,4555 2950,4545 3075,4545 3081.92,4551.92 3081.92,4584.2 U1.1
NetC2_1: C2.1 C3.1 D3.2 L1.1 R3.1 U1.3 | length 1242
  Top Layer w19.68: D3.2@2545,4425 C3.1 R3.1 v1(2640,4575) ; C2.1 v1(2840,4570) 2840,4500 2860,4480 2993.74,4480 3014.37,4459.37 ; L1.1@3014.37,4305 3014.37,4459.37 ; U1.3 3157.4,4500.16 3137.24,4480 3035,4480 3014.37,4459.37
  Bottom Layer w19.68: v1(2640,4575) 2645,4570 v1(2840,4570)
NetC2_2: C2.2 D1.2 R2.2 | length 360.5
  Top Layer w11.81: 2740,4400 R2.2 2780,4620 2790,4630 2790,4660 2805.31,4675.31 C2.2
NetC3_2: C3.2 R2.1 R3.2 U1.2 | length 934.1
  Top Layer w11.81: C3.2 R3.2 R2.1 2740,4760 2750,4770 2880,4770 2890,4760 2890,4540 2905,4525 3095,4525 3120,4550 U1.2
NetC4_1: C4.1 D2.2 U1.5 | length 770.8
  Top Layer w11.81: U1.5 3083.94,4693.78 3083.94,4655.75 3094.68,4645 3215.79,4645 3215.79,4715.14 3244.27,4743.62 D2.2
  Top Layer w19.68: 3215.79,4645 3215.79,4509.21 3305,4420 3365,4420 3385,4400 C4.1
NetC7_1: C7.1 R11.1 U3.2 | length 946.9
  Top Layer w19.68: C7.1 3695,4160 3700,4155 4008.47,4155 4020,4143.47 4020,4041.53 4031.53,4030 4168.5,4030 R11.1 4160,4041.42 4160,4120 4185,4145 4185,4225 4155,4255 U3.2
NetC8_2: C8.2 R14.1 U3.3 | length 251.8
  Top Layer w11.81: C8.2 R14.1@3940,4209.96
  Top Layer w19.68: R14.1 3954.96,4205 U3.3@4067.64,4205
NetC10_1: C10.1 R20.1 R21.1 U3.4 | length 940.7
  Top Layer w19.68: v1(4100,4110) U3.4@4100,4152.64 ; R20.1 R21.1 ; v1(4230,4440) C10.1@4300,4440
  Bottom Layer w19.68: v1(4100,4110) 4155,4110 4175,4130 4175,4420 4194.25,4439.25 4229.25,4439.25 v1(4230,4440) 4230,4510 4210,4530 4175,4530 4155,4550 v1(4155,4680)
NetD2_1: D2.1 R1.2 | length 302
  Top Layer w19.68: D2.1 3312.36,4481.85 3329.22,4465 3450,4465 3461.53,4476.53 3461.53,4517.12 R1.2
NetD4_A: D4.A R12.1 | length 114.7
  Top Layer w19.68: D4.A@2390,3165 R12.1
NetD5_2: D5.2 R15.2 | length 238
  Top Layer w19.68: D5.2 3915,2450 3945,2420 R15.2
NetD6_1: D6.1 K1.1 Q1.3 | length 645.5
  Top Layer w19.68: v1(4105.79,2190.79) Q1.3 4020,2145 4130,2035 D6.1
  Bottom Layer w19.68: v1(4105.79,2190.79) 4220,2305 K1.1
NetF1_2: F1.2 USB1.1 | length 201.2
  Top Layer w39.37: F1.2 2429.96,3455 2439.57,3464.61 2439.57,3540.83 USB1.1
NetF2_2: F2.2 USB1.5 | length 689.5
  Top Layer w39.37: USB1.5 2448.61,3884.52 2448.61,3948.61 2480,3980 2921.92,3980 2944.98,3956.94 2944.98,3916.21 2961.94,3899.25 2986.81,3899.25 2989.96,3896.1 F2.2
NetLS1_2: LS1.2 Q2.3 | length 343.1
  Top Layer w19.68: Q2.3 3430,3000 3520,2910 LS1.2@3520,2895
NetP1_1: P1.1 R11.2 R13.1 | length 3551.4
  Top Layer w11.81: R11.2 R11.2@4255.04,4016.46
  Top Layer w30: R11.2 v2(4360,4031.46)
  Top Layer w98.43: R13.1 4747.52,4143.47 v2(4890,4143.47)
  Bottom Layer w30: v2(4360,4031.46) 4948.54,4031.46 4955,4025
  Bottom Layer w98.43: P1.1@4660.91,1884.09 4565,1980 4565,3162.76 4568.15,3165.91 4568.15,3537.34 4625.81,3595 4920,3595 4955,3630 4955,4025 4955,4080 4891.53,4143.47 v2(4890,4143.47)
NetQ1_1: Q1.1 R15.1 | length 276.9
  Top Layer w19.68: v1(4055,2245) Q1.1@4055,2286.81 ; R15.1 v1(4105,2420)
  Bottom Layer w19.68: v1(4055,2245) 4055,2370 v1(4105,2420)
NetQ2_1: Q2.1 R36.2 | length 216
  Top Layer w19.68: v1(3090,3040) Q2.1@3128.19,3040 ; v1(3105,3145) R36.2 ; Q2.1 Q2.1@3142.4,3037.4
  Bottom Layer w19.68: v1(3090,3040) 3090,3130 v1(3105,3145)
NetR6_2: R6.2 U2.20 | length 158.7
  Top Layer w7.87: U2.20@3494.77,3360.32 3495,3360.08 U2.20@3495,3360 ; v1(3540,3110) R6.2
  Bottom Layer w7.87: 3495,3210 3540,3165 v1(3540,3110)
NetR7_2: R7.2 U2.42 | length 754.6
  Top Layer w7.87: R7.2 v1@2914.68,2950.32
  Bottom Layer w7.87: v1(2915,2950) 2915,3085 3070,3240 3245,3240 3270,3215 3370,3215 3395,3240
NetR8_2: R8.2 U2.43 | length 1055.1
  Top Layer w7.87: R8.2 v1(2560,3000) ; 3455.16,3625.16 U2.43
  Bottom Layer w7.87: v1(2560,3000) 2665,3000 2930,3265 3265,3265 3295,3235 3341.25,3235 3375,3268.75
NetR17_1: R17.1 R18.2 | length 104.9
  Top Layer w19.68: R17.1 R18.2
NetR18_1: R18.1 R19.2 | length 104.9
  Top Layer w19.68: R18.1 R19.2
NetR19_1: R19.1 R20.2 | length 100
  Top Layer w19.68: R19.1 R20.2@4020,4680
NetR25_1: R25.1 U4.1 | length 184.7
  Top Layer w19.68: R25.1 4241.93,2620 U4.1
NetR26_1: R26.1 U5.1 | length 114.9
  Top Layer w19.68: U5.1@4620,2980 R26.1
NetR27_1: R27.1 R29.1 U5.4 | length 281.4
  Top Layer w11.81: R29.1 4065.61,2976.95 R27.1 4236.93,2970 U5.4
NetR30_2: R30.2 U4.2 | length 183.4
  Top Layer w19.68: R30.2 4241.93,2520 U4.2
NetR33_1: R33.1 U8.1 | length 136
  Top Layer w30: U8.1 4610.57,2757.5 4732.42,2757.5 R33.1 4734.92,2759.92 R33.1@4730,2755
NetR34_1: R34.1 R35.1 U8.4 | length 287.2
  Top Layer w11.81: R35.1 4065.61,2761.95 R34.1 U8.4
NRST: C9.2 key1.2 P3.9 R10.1 U2.7
OSC32_IN: C12.1 U2.3 Y2.2 | length 722.5
  Top Layer w7.87: 3245,3600 3256.1,3588.9 U2.3
  Top Layer w11.81: 3245,3600 3245,3745 3285,3785 3285,3855 3315,3885 Y2.2 3350,3935 3375,3960 3520,3960 3540,3940 C12.1
OSC32_OUT: C15.1 U2.4 Y2.1 | length 635.5
  Top Layer w8: 3220,3595 3220,3580 3230.79,3569.21 U2.4
  Top Layer w11.81: v1(3180,3820) C15.1@3223.7,3820 ; 3220,3595 3220,3805 C15.1@3235.65,3820.65
  Bottom Layer w11.81: v1(3180,3820) v1@3434.61,3820
  other v1: 3436.61,3822.01
OSC_IN: C13.1 U2.5 Y1.1 | length 401
  Top Layer w8: 3140,3565 3140,3555 3145.47,3549.53 3305.38,3549.53 3305.55,3549.7 U2.5
  Top Layer w10: 3140,3565 3140,3615 Y1.1
  Top Layer w19.68: C13.1 3094.68,3670.32 Y1.1
OSC_OUT: C14.1 U2.6 Y1.2 | length 421.2
  Top Layer w7.87: Y1.2 3142.4,3430.6 3142.4,3520 3152.24,3529.84 U2.6
  Top Layer w19.68: C14.1 3106.69,3389.68 Y1.2
PA8: R35.2 U2.29 | length 940.9
  Top Layer w10: U2.29 3674.53,3490.47 3683.35,3481.65 3683.35,3358.47 3695,3346.81 3733.19,3346.81 3747.28,3332.72 3747.28,3082.72 3825,3005 v1(3825,2870) ; v1(3975,2870) R35.2
  Bottom Layer w10: v1(3825,2870) v1(3975,2870)
PA9: R30.1 U2.30 | length 1229.8
  Top Layer w11.81: U2.30 3689.84,3510.16 3703.19,3496.81 3703.19,3376.81 3715,3365 3750,3365 3768.19,3346.81 3768.19,3111.81 3900,2980 3900,2595 3975,2520 R30.1
PA10: R29.2 U2.31 | length 749.6
  Top Layer w11.81: U2.31 3705.16,3529.84 3725,3510 3725,3399.68 3735,3389.68 3770.32,3389.68 3790,3370 3790,3185 3905,3070 R29.2
PB10: M2.1 P4.3 U2.21 | length 1412.5
  Top Layer w7.87: 3514.21,3304.21 U2.21
  Top Layer w11.81: v1(3465,3285) 3495,3285 3514.21,3304.21
  Bottom Layer w11.81: 2945,2490 3010,2555 3185,2555 3290,2660 3290,2975 3465,3150 v1(3465,3285) ; 3065,2075 3065,1995 P4.3
PB11: M2.8 P4.2 U2.22 | length 1488.3
  Top Layer w11.81: P4.2 3215,2095 3215,2155 3280,2220 3280,2480 v1(3225,2535)
  Bottom Layer w11.81: v1(3225,2535) 3340,2650 3340,2945 3460,3065 3540,3065 3575,3100 3575,3165 3525,3215
PB12: M2.7 R37.1 U2.25 | length 1459
  Top Layer w11.81: R37.1@3005,2432.53 v1(3005,2505) ; U2.25 3626.18,3410 v1(3626.18,3378.82)
  Bottom Layer w11.81: v1(3005,2505) 3275,2505 3390,2620 3390,2920 3485,3015 3560,3015 3650,3105 3650,3355 v1(3626.18,3378.82)
PF: U3.7 U8.2 | length 97.6
  Top Layer w11.81: U3.7 v3(4400,4255)
RX: R22.1 U3.8 U4.4 | length 223.6
  Top Layer w11.81: U3.8 v3(4400,4305) ; U4.4 4724.92,2625 R22.1@4734.92,2635
SPEAK: R36.1 U2.28 | length 284
  Top Layer w7.87: R36.1 3170,3210 3200,3210 v1@3210,3200
  Bottom Layer w7.87: v1(3210,3210) 3225,3195 3380,3195 3415,3230
SWCLK: P3.7 U2.37 | length 1556.1
  Bottom Layer w7.87: P3.7 2205,3700 2220,3715 2220,3930 2235,3945 2275,3945 2885,3945 2960,3870 2960,3820 3005,3775 3250,3775 3320,3705
SWDIO: P3.6 U2.34 | length 1160.4
  Bottom Layer w11.81: P3.6 2215,3600 2225.11,3610.11 2225.11,3619.89 2225,3620 2225,3685 2240,3700 3195,3700
TX: U3.6 U5.2 | length 97.6
  Top Layer w11.81: U3.6 v3(4400,4205)
USART2_RX: P3.3 U2.13 | length 1274.7
  Top Layer w11.81: v1(3315,3315) 3315,3340 3335.55,3360.55 U2.13@3355,3360.55
  Bottom Layer w11.81: P3.3 3300,3300 v1(3315,3315)
USART2_TX: P3.4 U2.12 | length 1229.5
  Top Layer w11.81: v1(3290,3365) U2.12@3290,3410
  Bottom Layer w11.81: P3.4 2880,3400 2915,3365 v1(3290,3365)
VBAT: U2.1
pads on no net: M1.4 M2.2 M2.3 M2.6 U2.2 U2.10 U2.14 U2.15 U2.16 U2.17 U2.19 U2.26 U2.27 U2.32 U2.33 U2.38 U2.39 U2.40 U2.45 U2.46 U7.0 U7.3 U7.4 USB1.0 USB1.2 USB1.3 USB1.6 USB1.7 Y2.GND

## Polygon pours and split planes (outlines as drawn)
MCUGND on Top Layer "Keep-Out Layer-No Net" (solid, remove dead copper, shelved, pour order 10): 2951.94,4014.29 3716.94,4014.29 3716.94,3169.29 2951.94,3169.29
MCUGND on Top Layer "Keep-Out Layer-No Net" (solid, remove dead copper, shelved, pour order 14): 2935,4030 3715,4030 3715,3180 3710,3175 2935,3175
MCUGND on Top Layer "Keep-Out Layer-No Net" (solid, remove dead copper, shelved, pour order 18): 2890,3980 3725,3980 3725,3095.08 2905.22,3095.08 2890.04,3080
MCUGND on Top Layer "Keep-Out Layer-No Net" (solid, remove dead copper, shelved, pour order 22): 3690,3185 3690,3975 2945,3975 2945,3170
MCUGND on Bottom Layer "Keep-Out Layer-No Net" (solid, remove dead copper, shelved, pour order 8): 2946.73,4015.65 3707.1,4015.65 3711.73,4010.65 3711.73,3170.65 2946.73,3170.65
MCUGND on Bottom Layer "Keep-Out Layer-No Net" (solid, remove dead copper, shelved, pour order 12): 2935,4030 3715,4030 3715,3175 2935,3175
MCUGND on Bottom Layer "Keep-Out Layer-No Net" (solid, remove dead copper, shelved, pour order 16): 2865,4015 3710,4015 3715,4010 3715,3115 2860,3115
MCUGND on Bottom Layer "Keep-Out Layer-No Net" (solid, remove dead copper, shelved, pour order 20): 2945,3975 3690,3975 3690,3185 2945,3185

## Keep-outs
Keep-Out Layer:
  lines w7.5: 2045,1805 ccw(c2119.95,1805) 2119.95,1730.05 ; 2045.05,4744.46 cw(c2120,4744.46) 2120,4819.41 ; 5119.65,4819.41 cw(c5119.65,4744.46) 5194.61,4744.46 ; 5135,1730 ccw(c5135,1790) 5195,1790
  lines w7.87: 2045,1805 2045,4744.46 ; 2119.95,1730.05 2119.95,1730 3207.32,1730 ; 2120,4819.41 5119.65,4819.41 ; 3207.36,1730.04 3207.36,1925.71 ; 4032.32,1925.71 4032.32,1730 5135,1730 ; 5194.61,1790 5194.61,4744.46 ; 3830,3190 3830,3950 4510,3950 4510,3190 3830,3190
  lines w10: 3207.36,1925.71 cw(c3619.84,1926.42) 4032.32,1925.71

## Silkscreen, mask and mechanical layers (free items; w line width, h text height)
Top Overlay:
  text "AC~IN" at 4790,4740 h39.37
  text "NRST" at 2185,3990 h31.5 r270
  text "3V3" at 2185,3850 h31.5 r270
  text "CLK" at 2185,3745 h31.5 r270
  text "DIO" at 2185,3640 h31.5 r270
  text "GND" at 2185,3535 h31.5 r270
  text "TX" at 2185,3420 h31.5 r270
  text "RX" at 2185,3325 h31.5 r270
  text "SDA" at 2185,3240 h31.5 r270
  text "SCL" at 2185,3130 h31.5 r270
  text "3V3" at 3075,2090 h31.5 r90
  text "RX" at 3080,2000 h31.5 r90
  text "TX" at 3080,1895 h31.5 r90
  text "AC~OUT" at 4950,1785 h39.37
  text "GND" at 3080,1770 h31.5 r90